# Altium PCB SebastianAltiumClassPCB.PcbDoc
Units mm, origin at the board's own origin, x right, y up, seen from the top; angles counter-clockwise.
Board outline 39 x 13 mm, 2 copper layers (Top Layer, Bottom Layer); 14 components, 11 nets, 42 pads, 15 vias.
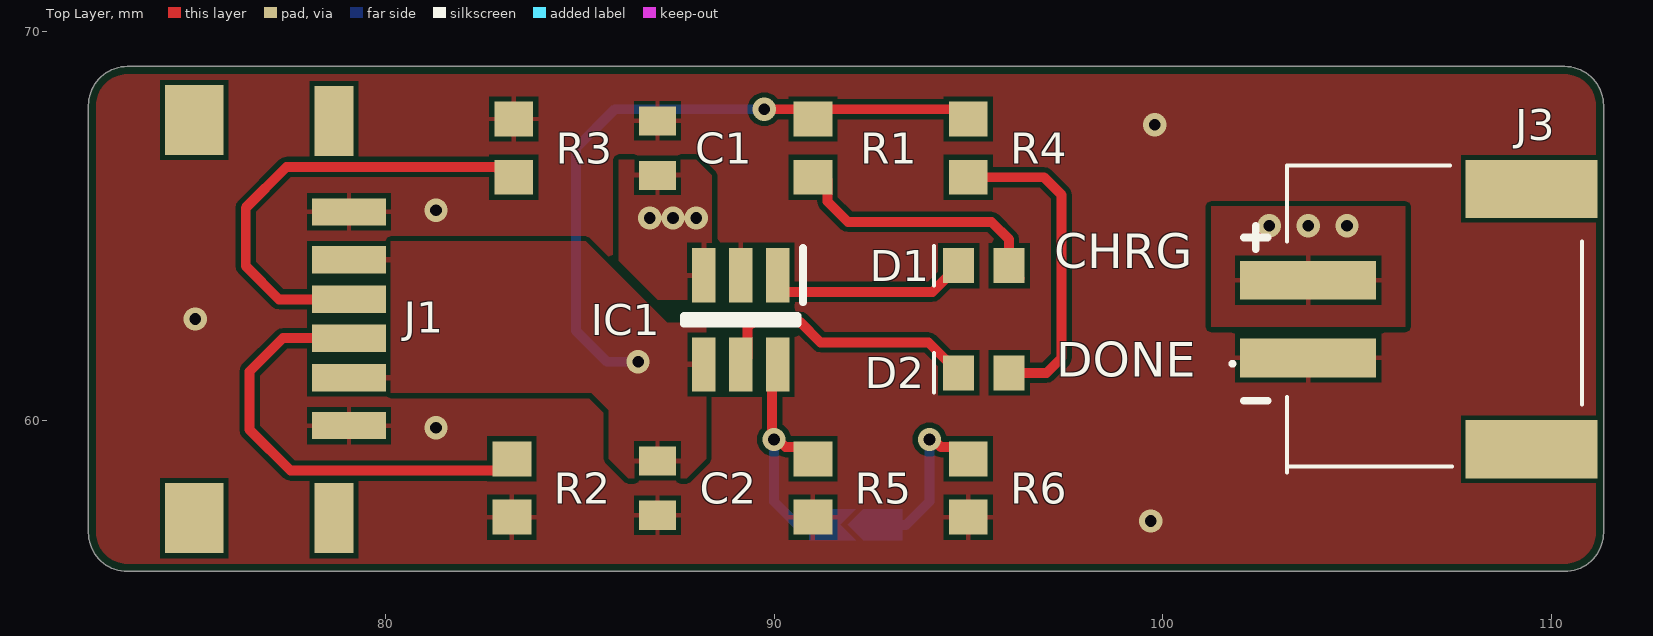
[diagram p0: Top Layer view]
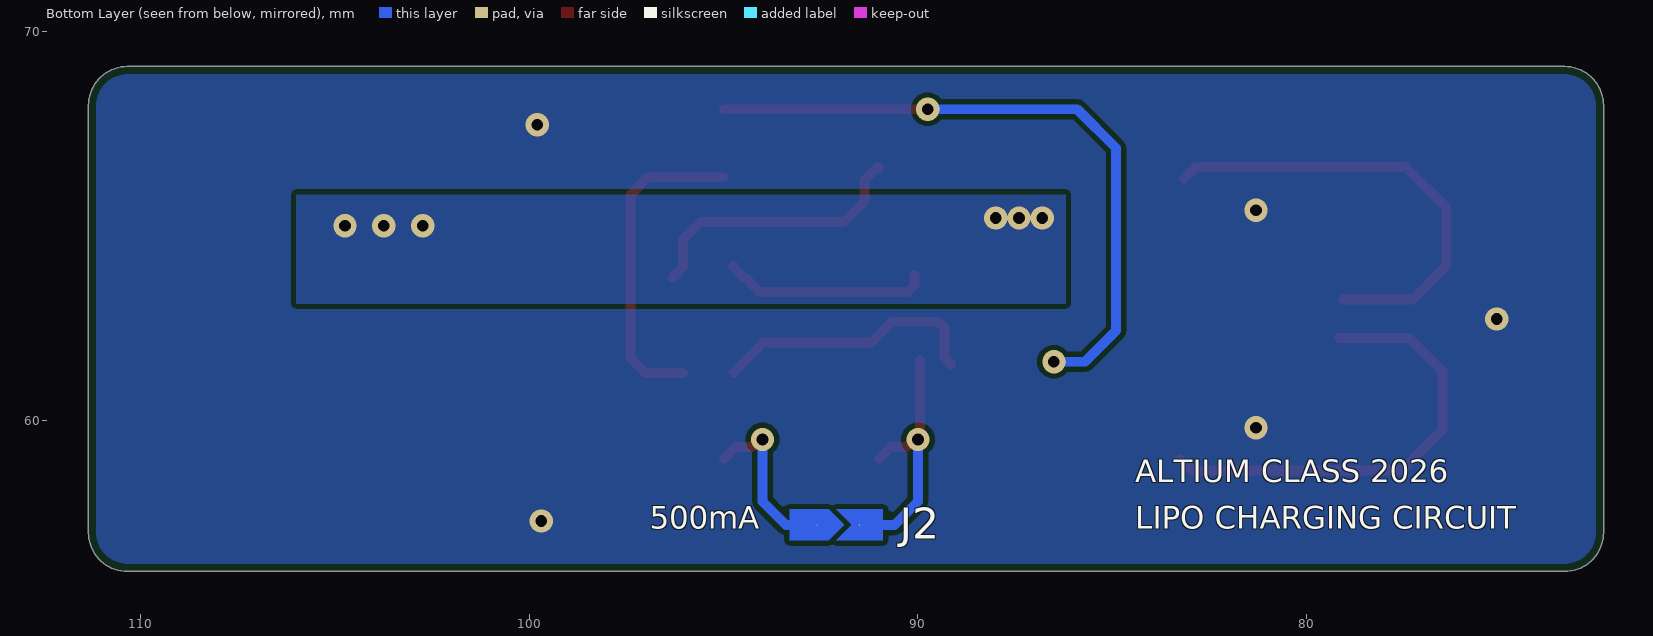
[diagram p1: Bottom Layer view, seen from below]
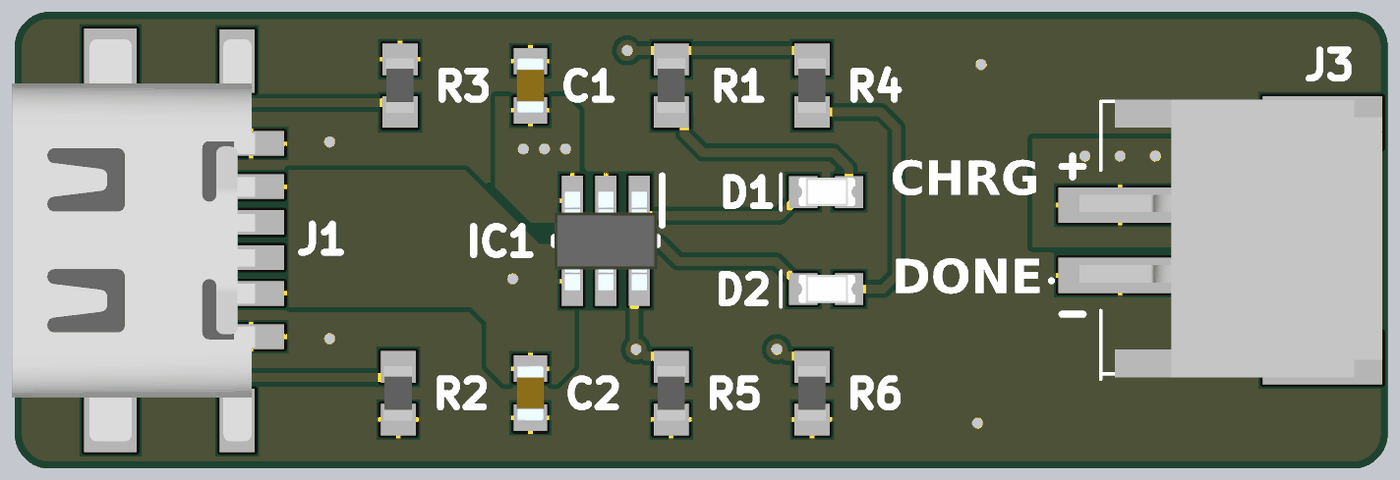
[diagram p2: 3D render of the assembled board from above, using the file's embedded part models]

## Layer stack, top to bottom
Top Solder: solder mask 0.0102, Solder Resist, Dk 3.5
Top Layer: signal copper 0.0356
Dielectric 1: dielectric 0.32, FR-4, Dk 4.8
Bottom Layer: signal copper 0.0356
Bottom Solder: solder mask 0.0102, Solder Resist, Dk 3.5

## Board outline
72.352,57.102 72.352,68.102 cw(c73.352,68.102) 73.352,69.102 110.352,69.102 cw(c110.352,68.102) 111.352,68.102 111.352,57.102 cw(c110.352,57.102) 110.352,56.102 73.352,56.102 cw(c73.352,57.102)

## Design rules (kind name [scope] priority, off if disabled: settings)
BoardOutlineClearance [All] p1: gap=0.2 ignorepadtopadclearanceinfootprint=FALSE
Clearance [All] p1: gap=0.127 ignorepadtopadclearanceinfootprint=FALSE except(0.25: Arc-Hole Track-Hole SMDPad-Hole THPad-Hole Via-Hole Fill-Hole Poly-Hole Region-Hole Text-Hole)
ComponentClearance [All] p1: gap=0.127 collisioncheckmode=3 verticalgap=0.127 showdistances=TRUE
DiffPairsRouting [All] p1: maxlimit=0.254 minlimit=0.127 mostfreqgap=0.127 toplayer_minwidth=0.127 toplayer_maxwidth=25.4 toplayer_prefwidth=0.127 bottomlayer_minwidth=0.127 bottomlayer_maxwidth=25.4 bottomlayer_prefwidth=0.127 maxuncoupledlength=12.7
Height [All] p1: minheight=0 maxheight=1816.048 prefheight=12.7
HoleSize [All] p1: absolutevalues=TRUE maxlimit=6.3 minlimit=0.3 maxpercent=80.000 minpercent=20.000
HoleToHoleClearance [All] p1: gap=0.25 allowstackedmicrovias=FALSE
MinimumAnnularRing [All] p1: minimumring=0.076
MinimumSolderMaskSliver [All] p1: minsoldermaskwidth=0
PlaneClearance [All] p1: clearance=0.127
PlaneConnect PlaneConnectPowerPads [InPadClass('PowerPads')] p1: planeconnectstyle=Direct reliefexpansion=0.508 reliefentries=4 reliefconductorwidth=0.254 reliefairgap=0.254
PlaneConnect [All] p2: pad.planeconnectstyle=Relief pad.reliefexpansion=0.3 pad.reliefentries=4 pad.reliefconductorwidth=0.127 pad.reliefairgap=0.127 via.planeconnectstyle=Direct via.reliefexpansion=0.3 via.reliefentries=4 via.reliefconductorwidth=0.127 via.reliefairgap=0.127
PolygonConnect PolygonConnectPowerPads [All vs (InPadClass('PowerPads'))] p1: connectstyle=Direct reliefconductorwidth=0.254 reliefentries=4 polygonreliefangle="90 Angle" airgapwidth=0.254
PolygonConnect [All] p2: thpad.connectstyle=Relief thpad.reliefconductorwidth=0.127 thpad.reliefentries=4 thpad.polygonreliefangle="90 Angle" thpad.airgapwidth=0.127 smdpad.connectstyle=Relief smdpad.reliefconductorwidth=0.127 smdpad.reliefentries=4 smdpad.polygonreliefangle="90 Angle" smdpad.airgapwidth=0.127 via.connectstyle=Direct via.reliefconductorwidth=0.127 via.reliefentries=4 via.polygonreliefangle="90 Angle" via.airgapwidth=0.127
RoutingVias [All] p1: holewidth=0.3 width=0.6 viastyle="Through Hole" minholewidth=0.3 minwidth=0.6 maxholewidth=0.6 maxwidth=6.6
SilkToSilkClearance [All] p1: silktosilkclearance=0
SilkToSolderMaskClearance [IsPad] p1: minsilkscreentomaskgap=0.127 clearancetoexposedcopper=TRUE
SolderMaskExpansion [All] p1: expansion=0.075 istentingtop=FALSE
SupplyNets "Schematic Supply Nets_1" [InNet('+5V')] p1: voltage=0.000
SupplyNets "Schematic Supply Nets" [InNet('GND')] p2: voltage=0.000
Width [All] p1: maxlimit=25.4 minlimit=0.127 preferedwidth=0.127 minimp=50.000000 maximp=50.000000 favimp=50.000000
20 further rules are at their usual default settings.

## Components (designator, comment, footprint, x,y, rotation, side; value= is the part's Value field where it differs from the comment)
C1 "4.7uF" CAP0603 87,67 r270 top
C2 "4.7uF" CAP0603 87,58.25 r90 top
D1 "LED" LED0603 94.75,63.974 r0 top
D2 "LED" LED0603 94.75,61.215 r0 top
IC1 "TP4057" SOT95P280X125-6N 89.143,62.582 r270 top
J1 "USB-C" USBC 76.9,62.6 r270 top locked
J2 "SOLDERBRIDGE" SOLDERBRIDGE 92.6,57.3 r180 bottom
J3 "S2B-PH-SM4-TB" S2BPHSM4TBLFSN 107,62.6 r270 top locked
R1 "10K" RES0603 91,67 r90 top
R2 "5.1K" RES0603 83.25,58.25 r90 top
R3 "5.1K" RES0603 83.3,67 r90 top
R4 "10K" RES0603 95,67 r90 top
R5 "10K" RES0603 91,58.25 r90 top
R6 "2.4K" RES0603 95,58.25 r90 top

## Footprints (in the part's own frame and the unit in brackets; to place one, negate y for a bottom-side part, rotate by r counter-clockwise, add the part's x,y. Pads: shape width x height; smd on the part's side, far side on the other; paste and mask are expansions set on the pad)
CAP0603 [mm]
  rect 0.75x0.94 smd: 1(-0.7,0) 2(0.7,0)
  body extent -0.8,-0.4 0.8,0.4, height 0.9
LED0603 [mm]
  rect 0.8x0.9 smd: 1(0,0) 2(1.3,0)
  silkscreen extent -0.64,-0.51 -0.64,0.51, body extent -0.13,-0.4 1.47,0.4, height 0.59
RES0603 [mm]
  rect 0.9x1 smd: 1(-0.75,0) 2(0.75,0)
  body extent -0.77,-0.4 0.78,0.4, height 0.45
S2BPHSM4TBLFSN [mm]
  rect 1x3.5 smd: 1(1,-3.25) 2(-1,-3.25)
  rect 1.5x3.4 smd: MP1(3.35,2.5) MP2(-3.35,2.5)
  silkscreen extent -3.95,-5.25 3.95,3.8, body extent -4,-4.4 3.9,4.2, height 5.6
SOLDERBRIDGE [mil]
  round 1 smd: 1(0,0) 2(43.31,0)
  Top Layer region: 19.69,15.75 35.43,0 19.69,-15.75 66.93,-15.75 66.93,15.75
  Top Layer region: 11.81,15.75 -27.56,15.75 -27.56,-15.75 11.81,-15.75 27.56,0
SOT95P280X125-6N [mm]
  rect 1.4x0.6 smd: 1(-1.15,0.95) 2(-1.15,0) 3(-1.15,-0.95) 4(1.15,-0.95) 5(1.15,0) 6(1.15,0.95)
  silkscreen extent -1.85,-1.46 0.1,1.6, body extent -1.4,-1.46 1.4,1.46, height 1.25
USBC [mm]
  rect 0.7x1.9 smd: A5(-0.508,2.159) A9(1.512,2.159) A12(2.742,2.159) B5(0.492,2.159) B9(-1.528,2.159) B12(-2.758,2.159)
  rect 1.8x1 smd: MP1(-5.1,1.772) MP2(5.125,1.772)
  rect 1.8x1.5 smd: MP3(-5.125,-1.827) MP4(5.125,-1.827)
  body extent -5.72,-4.62 5.72,2.28, height 3.18

## Part data
C1 C2: library part Capacitor_4.7uF, "4.7uF Capacitor, 0603", Capacitance=4.7µF
D1 D2: "LED, 0603"
IC1: "Lithium-Ion Battery Charger, 500mA max", Manufacturer_Name="Nanjing Extension Microelectronics", Manufacturer_Part_Number=TP4057-42-SOT26-R, Datasheet Link=https://datasheet.lcsc.com/szlcsc/Nanjing-Extension-Microelectronics-TP4057_C12044.pdf, Height=1.25mm
J1: "USB-C Port, Power Only"
J3: "DigiKey Part -  / PH Series 2 pin connector -  / S2B-PH-SM4-TB", Arrow Part Number=S2B-PH-SM4-TB(LF)(SN), Manufacturer_Name="JST (JAPAN SOLDERLESS TERMINALS)", Mouser Part Number=N/A, Arrow Price/Stock=https://www.arrow.com/en/products/s2b-ph-sm4-tb-lf-sn/jst-manufacturing?utm_currency=USD&region=europe, Datasheet Link=https://www.jst-mfg.com/product/pdf/eng/ePH.pdf, Height=6.6mm, Manufacturer_Part_Number=S2B-PH-SM4-TB(LF)(SN), Mouser Price/Stock=https://www.mouser.co.uk/ProductDetail/JST-Commercial/S2B-PH-SM4-TBLFSN?qs=QpmGXVUTftEA9IU90i0xlg%3D%3D
R1 R4 R5: library part Resistor_10K, "10K Resistor, 0603", Resistance=10K
R2 R3: library part Resistor_5.1K, "5.1K Resistor, 0603", Resistance=5.1K
R6: library part Resistor_2K, "2.4K Resistor, 0603", Resistance=2.4K

## Via types
v1: diameter 0.6, hole 0.3, Top Layer to Bottom Layer, tented both sides, 15 vias

## Nets (pads, with @x,y where several pads share a name; then routed paths per layer and width w, separated by ;. In a path a pad name is that pad's centre, name@x,y a point inside that pad or via, vN(x,y) a via of type N, cw(c..) or ccw(c..) an arc to the next point about the centre after c; other vN are vias at no path point)
+5V: C2.2 IC1.4 J1.A9 J1.B9 R1.2 R4.2 | length 17.1
  Top Layer w0.254: v1(89.75,68) 91,68 R4.2@95,68
  Bottom Layer w0.254: v1(86.5,61.5) 85.7,61.5 84.9,62.3 84.9,67 85.9,68 v1(89.75,68)
+BAT: C1.2 IC1.3 J3.2
  other v1: 102.75,65 103.75,65 104.75,65 86.8,65.2 87.4,65.2 88,65.2
GND: C1.1 C2.1 IC1.2 J1.A12 J1.B12 J3.1 R2.1 R3.2 R5.1 R6.1
  other v1: 99.7,57.4 81.3,59.8 75.1,62.6 81.3,65.4 99.8,67.6
NetD1_1: D1.1 IC1.1 | length 5.3
  Top Layer w0.254: IC1.1 90.093,63.473 90.266,63.3 94.076,63.3 94.427,63.651 94.477,63.651 94.75,63.924 D1.1
NetD1_2: D1.2 R1.1 | length 7.3
  Top Layer w0.254: R1.1@91,66.5 91.05,66.5 91.373,66.177 91.373,65.627 91.9,65.1 95.6,65.1 96.044,64.656 96.044,63.929 D1.2@96.323,63.651
NetD2_1: D2.1 IC1.5 | length 7.1
  Top Layer w0.254: IC1.5 89.316,61.605 89.316,62.382 89.465,62.531 90.669,62.531 91.2,62 93.977,62 94.75,61.227 D2.1
NetD2_2: D2.2 R4.1 | length 8.3
  Top Layer w0.254: R4.1 96.95,66.25 97.4,65.8 97.4,61.6 97.015,61.215 D2.2
NetIC1_6: IC1.6 J2.2 R5.2 | length 6.6
  Top Layer w0.254: IC1.6@89.95,61.55 89.95,59.55 90.044,59.55 90.291,59.303 90.697,59.303 R5.2
  Bottom Layer w0.254: v1(90,59.5) 90,57.9 90.6,57.3 J2.2
NetJ1_A5: J1.A5 R3.1 | length 11.8
  Top Layer w0.254: J1.A5 77.258,63.108 76.4,63.966 76.4,65.466 77.45,66.516 82.85,66.516 R3.1@83.15,66.216
NetJ1_B5: J1.B5 R2.2 | length 11.8
  Top Layer w0.254: J1.B5@79.159,62.108 77.358,62.108 76.5,61.25 76.5,59.75 77.55,58.7 82.95,58.7 R2.2
NetJ2_1: J2.1 R6.2 | length 4.5
  Top Layer w0.254: v1(94,59.5) 94.094,59.5 94.291,59.303 94.697,59.303 R6.2
  Bottom Layer w0.254: J2.1 93.4,57.3 94,57.9 v1(94,59.5)
pads on no net: J1.MP1 J1.MP2 J1.MP3 J1.MP4 J3.MP1 J3.MP2

## Polygon pours and split planes (outlines as drawn)
GND on Top Layer "NONET_L-01_P-001" (solid, pour order 8): 72.352,57.102 72.352,68.102 cw(c73.352,68.102) 73.352,69.102 110.352,69.102 cw(c110.352,68.102) 111.352,68.102 111.352,57.102 cw(c110.352,57.102) 110.352,56.102 73.352,56.102 cw(c73.352,57.102)
+5V on Top Layer "NONET_L-01_P-001" (solid, pour order 2): 88.25,59 87.75,58.5 86.25,58.5 85.75,59 85.75,60.25 85.3,60.7 78,60.7 78,64.6 85.15,64.6 87.25,62.5 88.25,62.5
+BAT on Top Layer "NONET_L-01_P-001" (solid, pour order 6): 101.25,62.4 106.25,62.4 106.25,65.5 101.25,65.5
+BAT on Top Layer "NONET_L-01_P-001" (solid, pour order 0): 88.4,63.1 87,63.1 86,64.1 86,66.7 88,66.7 88.4,66.3
GND on Bottom Layer "NONET_L-01_P-001" (solid, pour order 7): 72.352,57.102 72.352,68.102 cw(c73.352,68.102) 73.352,69.102 110.352,69.102 cw(c110.352,68.102) 111.352,68.102 111.352,57.102 cw(c110.352,57.102) 110.352,56.102 73.352,56.102 cw(c73.352,57.102)
+BAT on Bottom Layer "NONET_L-01_P-001" (solid, pour order 4): 106,63 106,65.8 86.2,65.8 86.2,63

## Silkscreen, mask and mechanical layers (free items; w line width, h text height)
Top Overlay:
  lines w0.1: 103.2,58.8 107.45,58.8
  lines w0.2: 102.1,60.5 102.7,60.5 ; 102.1,64.7 102.7,64.7 ; 102.4,64.4 102.4,65
  text "CHRG" at 97.218,63.614 h1.52
  text "DONE" at 97.258,60.814 h1.52
Bottom Overlay:
  text "ALTIUM CLASS 2026" at 84.4,58.212 h1
  text "LIPO CHARGING CIRCUIT" at 84.4,57.012 h1
  text "500mA" at 96.9,57.012 h1
Mechanical 1:
  the board outline again, w0.05